# Altium PCB Pedal_SW.PcbDoc
Units mil, origin at the board's own origin, x right, y up, seen from the top; angles counter-clockwise.
Board outline 5452.6 x 517.36 mil, 2 copper layers (Top Layer, Bottom Layer), stack 42.17 mil thick; 21 components, 33 nets, 106 pads, 8 vias.
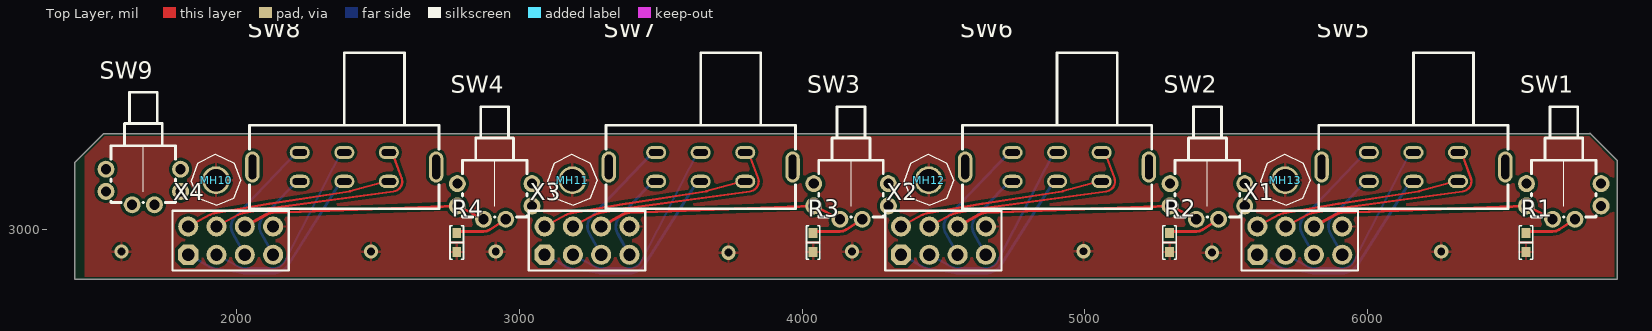
[diagram p0: Top Layer view]
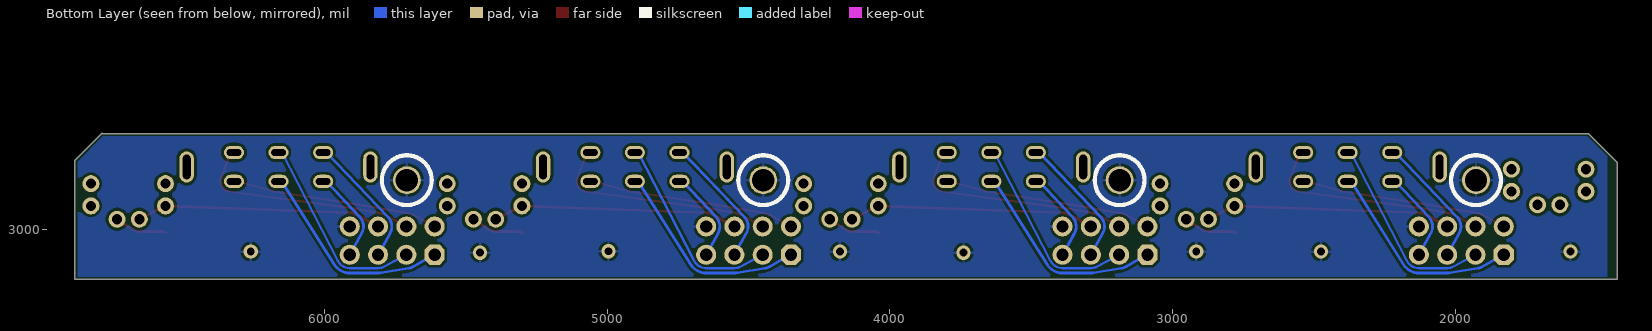
[diagram p1: Bottom Layer view, seen from below]
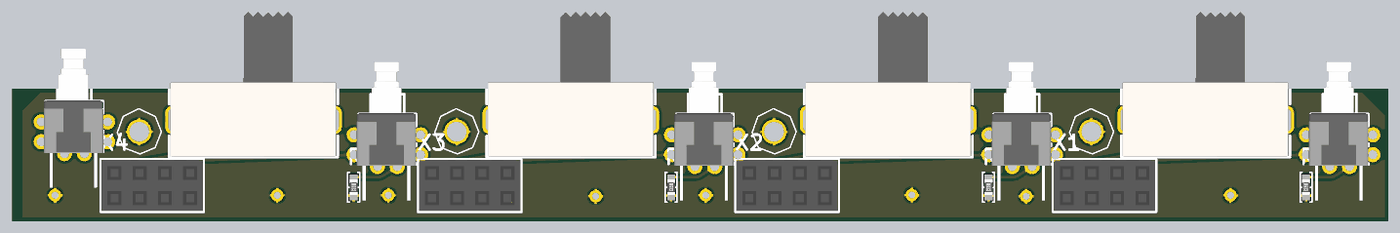
[diagram p2: 3D render of the assembled board from above, using the file's embedded part models]

## Layer stack, top to bottom
Top Solder: solder mask 0.4, Solder Resist, Dk 3.5
Top Layer: signal copper 1.4
Dielectric 1: dielectric 39.3701, FR-4, Dk 4.8
Bottom Layer: signal copper 1.4
Bottom Solder: solder mask 0.4, Solder Resist, Dk 3.5

## Board outline
1429.13,2822.83 1429.13,3236.22 1531.5,3338.58 6786.42,3338.58 6784.96,3340.2 6880.28,3244.88 6881.73,3243.27 6881.73,2822.83

## Design rules (kind name [scope] priority, off if disabled: settings)
BoardOutlineClearance [All] p1: gap=10 ignorepadtopadclearanceinfootprint=FALSE except(0: Arc-SplitContinuation Track-SplitContinuation SMDPad-SplitContinuation THPad-SplitContinuation Via-SplitContinuation Fill-SplitContinuation Poly-SplitContinuation Region-SplitContinuation Text-SplitContinuation)
Clearance [All] p1: gap=10 ignorepadtopadclearanceinfootprint=FALSE except(8: Arc-Arc Arc-Track Arc-SMDPad Arc-THPad Arc-Via Track-Track Track-SMDPad Track-THPad Track-Via)
PolygonConnect [All] p1: connectstyle=Relief reliefconductorwidth=10 reliefentries=4 polygonreliefangle="90 Angle" airgapwidth=10
RoutingVias [All] p1: holewidth=28 width=50 viastyle="Through Hole" minholewidth=28 minwidth=50 maxholewidth=28 maxwidth=50
SolderMaskExpansion [All] p1: expansion=4 istentingtop=FALSE
Width [All] p1: maxlimit=10 minlimit=8 preferedwidth=10
30 further rules are at their usual default settings.

## Classes and differential pairs
component class Pedal_SW: R1 R2 R3 R4 SW1 SW2 SW3 SW4 SW5 SW6 SW7 SW8 SW9 X1 X2 X3 X4

## Components (designator, comment, footprint, x,y, rotation, side; value= is the part's Value field where it differs from the comment)
MH10 "MountingHole" Hole_2.5mm 1928.32,3173.63 r0 top
MH11 "MountingHole" Hole_2.5mm 3188.16,3173.63 r0 top
MH12 "MountingHole" Hole_2.5mm 4448.01,3173.63 r0 top
MH13 "MountingHole" Hole_2.5mm 5707.85,3173.63 r0 top
R1 "510 Ohms" "YAGEO RES 0603_1608" 6559.37,2953.15 r270 top
R2 "510 Ohms" "YAGEO RES 0603_1608" 5299.37,2953.15 r270 top
R3 "510 Ohms" "YAGEO RES 0603_1608" 4039.37,2953.15 r270 top
R4 "510 Ohms" "YAGEO RES 0603_1608" 2779.37,2953.15 r270 top
SW1 "PushSwitch_DPDT" TK-6580A-1 6824.8,3161.42 r180 top
SW2 "PushSwitch_DPDT" TK-6580A-1 5564.96,3161.42 r180 top
SW3 "PushSwitch_DPDT" TK-6580A-1 4305.12,3161.42 r180 top
SW4 "PushSwitch_DPDT" TK-6580A-1 3045.28,3161.42 r180 top
SW5 "SlideSwitch_DPDT" SK-22F03-G060 6161.42,3271.65 r180 top
SW6 "SlideSwitch_DPDT" SK-22F03-G060 4901.57,3271.65 r180 top
SW7 "SlideSwitch_DPDT" SK-22F03-G060 3641.73,3271.65 r180 top
SW8 "SlideSwitch_DPDT" SK-22F03-G060 2381.89,3271.65 r180 top
SW9 "PushSwitch_DPDT" TK-6580A-1 1803.15,3212.6 r180 top
X1 "Connector, 8pin, 2.54mm, 500VAC, 3A" "CON: PBD-8" 5759.69,2960 r0 top
X2 "Connector, 8pin, 2.54mm, 500VAC, 3A" "CON: PBD-8" 4499.84,2960 r0 top
X3 "Connector, 8pin, 2.54mm, 500VAC, 3A" "CON: PBD-8" 3240,2960 r0 top
X4 "Connector, 8pin, 2.54mm, 500VAC, 3A" "CON: PBD-8" 1980.16,2960 r0 top

## Footprints (in the part's own frame and the unit in brackets; to place one, negate y for a bottom-side part, rotate by r counter-clockwise, add the part's x,y. Pads: shape width x height; smd on the part's side, far side on the other; paste and mask are expansions set on the pad)
"CON: PBD-8" [mm] "PBD-8"
  oct 1.8x1.8 hole 1.1: 1(-3.81,-1.27)
  round 1.8 hole 1.1: 2(-3.81,1.27) 3(-1.27,-1.27) 4(-1.27,1.27) 5(1.27,-1.27) 6(1.27,1.27) 7(3.81,-1.27) 8(3.81,1.27)
  silkscreen extent -5.23,-2.68 5.23,2.68, body extent -5.08,-2.54 5.08,2.54, height 8.5
Hole_2.5mm [mm]
  round 2.5 hole 2: 0(0,0)
  body extent -0.5,-0.5 0.5,0.5, height 0.5
SK-22F03-G060 [mm] "G-Switch SK-22F03-G060"
  oval 1.8x1.2 hole 0.6 slot 1.3 at 0 deg paste-2539.97 mask+0.05: 1(-4,0) 2(0,0) 3(4,0) 4(4,2.6) 5(0,2.6) 6(-4,2.6)
  oval 1.3x2.8 hole 0.7 slot 2.2 at 90 deg paste-2539.97 mask+0.05: 7(-8.25,1.3) 8(8.25,1.3)
  silkscreen extent -8.5,-8.95 8.5,5.05, body extent -8.32,-9.59 8.38,5.01, height 9
TK-6580A-1 [mil] "Pushbutton switch"
  round 60 hole 36 paste-99999 mask+2: 1(263.78,0) 2(263.78,78.74) 3(0,0) 4(0,78.74) 5(171.26,125.98) 6(92.52,125.98)
  silkscreen extent 18,-272 246,118, body extent 18,-291 254,261, height 317
"YAGEO RES 0603_1608" [mm] "Chip Resistor, 2-Leads, Body 1.60x0.80mm"
  rect 0.9x0.8 smd: 1(-0.85,0) 2(0.85,0)
  silkscreen extent -1.5,-0.6 1.5,0.6, body extent -0.8,-0.4 0.8,0.4, height 0.45

## Part data
R1 R2 R3 R4: library part AC0603FR-07510RL, "RES SMD 510 OHM 1% 1/10W 0603", Device Package="0603 (1608 Metric)", Manufacturer=Yageo, Operating Temperature="-55°C ~ 155°C", Power (Watts)="0.1W, 1/10W", Ratings=AEC-Q200, Supplier Device Package=0603, Supplier Part Number 1=YAG3615CT-ND, Temperature Coefficient=±100ppm/°C, Tolerance=±1%, ComponentLink1Description=Datasheet, ComponentLink1URL=https://www.yageo.com/upload/media/product/productsearch/datasheet/rchip/PYu-AC_51_RoHS_L_7.pdf, ComponentLink2Description="DigiKey Link", ComponentLink2URL=https://www.digikey.com/en/products/detail/yageo/AC0603FR-07510RL/5896175, Composition="Thick Film", Features="Automotive AEC-Q200, Moisture Resistant", Height - Seated (Max)="0.022\" (0.55mm)", LastUpdated="7/25/2024 9:19:25 AM", Lifecycle Status=Active, Minimum Order=1, Number of Terminations=2, Package / Case="0603 (1608 Metric)", Packaging=CutTape, Part Number=AC0603FR-07510RL, Part Status=Active, PartId=15979, Price=0.01, Resistance="510 Ohms", Series=AC, Size / Dimension="0.063\" L x 0.031\" W (1.60mm x 0.80mm)", Supplier 1=DigiKey
X1 X2 X3 X4: library part PBD-8, CurrentMax=3A, Manufacturer=Connfly, VoltageMax=500VAC, CommentText="\"Разъем\"", HelpURL=https://www.chipdip.ru/product/pbd-8, Multichannel=8pin, PartNumber=PBD-8, Pitch=2.54mm, TypeConnector=Connector, ValueManufacturerPartNumber="Connector, 8pin, 2.54mm, 500VAC, 3A"

## Via types
v1: diameter 50, hole 28, Top Layer to Bottom Layer, 8 vias

## Nets (pads, with @x,y where several pads share a name; then routed paths per layer and width w, separated by ;. In a path a pad name is that pad's centre, name@x,y a point inside that pad or via, vN(x,y) a via of type N, cw(c..) or ccw(c..) an arc to the next point about the centre after c; other vN are vias at no path point)
GND_A: MH10.0 MH11.0 MH12.0 MH13.0 R1.2 R2.2 R3.2 R4.2 X1.8 X2.8 X3.8 X4.8
  other v1: 3740.16,2917.32 5448.82,2917.32 1594.49,2921.26 2476.38,2921.26 2917.32,2921.26 4177.17,2921.26 6259.84,2921.26 4995,2922.32
NetR1_1: R1.1 SW1.6 | length 186.9
  Top Layer w10: R1.1@6558.9,2986.61 6569.65,2992.43 6653.54,2992.43 ccw(c6653.54,3035.43) 6677.03,2999.41 SW1.6
NetR2_1: R2.1 SW2.6 | length 186.9
  Top Layer w10: R2.1@5299.05,2986.61 5309.8,2992.43 5393.7,2992.43 ccw(c5393.7,3035.43) 5417.18,2999.41 SW2.6
NetR3_1: R3.1 SW3.6 | length 186.9
  Top Layer w10: R3.1@4039.21,2986.61 4049.96,2992.43 4133.86,2992.43 ccw(c4133.86,3035.43) 4157.34,2999.41 SW3.6
NetR4_1: R4.1 SW4.6 | length 186.9
  Top Layer w10: R4.1 2790.12,2992.43 2874.02,2992.43 ccw(c2874.02,3035.43) 2897.5,2999.41 SW4.6
NetSW1_2: SW1.2 SW1.5 X1.6 | length 867.9
  Top Layer w10: X1.6 5886.23,3052.37 cw(c5909.69,3010) 5907.89,3058.4 SW1.2 6561.47,3082.67 cw(c6561.32,3072.67) 6565.98,3081.52 SW1.5
NetSW2_2: SW2.2 SW2.5 X2.6 | length 867.9
  Top Layer w10: X2.6 4626.38,3052.37 cw(c4649.84,3010) 4648.04,3058.4 SW2.2 5301.62,3082.67 cw(c5301.47,3072.67) 5306.13,3081.52 SW2.5
NetSW3_2: SW3.2 SW3.5 X3.6 | length 867.9
  Top Layer w10: X3.6 3366.54,3052.37 cw(c3390,3010) 3388.2,3058.4 SW3.2 4041.78,3082.67 cw(c4041.63,3072.67) 4046.29,3081.52 SW3.5
NetSW4_2: SW4.2 SW4.5 X4.6 | length 867.9
  Top Layer w10: X4.6 2106.7,3052.37 cw(c2130.16,3010) 2128.36,3058.4 SW4.2 2781.94,3082.67 cw(c2781.79,3072.67) 2786.45,3081.52 SW4.5
SW1_1: SW5.1 X1.4 | length 814.5
  Top Layer w8: X1.4 5787.19,3051.76 cw(c5809.69,3010) 5801.17,3056.66 5897.91,3074.36 cw(c5909.69,3010) 5900.86,3074.84 6335.51,3133.99 ccw(c6330.71,3169.29) 6364.1,3181.69 6330.71,3271.65 SW5.1
SW1_2: SW6.1 X2.4 | length 814.5
  Top Layer w8: X2.4 4527.34,3051.76 cw(c4549.84,3010) 4541.32,3056.66 4638.06,3074.36 cw(c4649.84,3010) 4641.02,3074.84 5075.67,3133.99 ccw(c5070.86,3169.29) 5104.26,3181.69 5070.86,3271.65 SW6.1
SW1_3: SW7.1 X3.4 | length 814.5
  Top Layer w8: X3.4 3267.5,3051.76 cw(c3290,3010) 3281.48,3056.66 3378.22,3074.36 cw(c3390,3010) 3381.18,3074.84 3815.83,3133.99 ccw(c3811.02,3169.29) 3844.42,3181.69 3811.02,3271.65 SW7.1
SW1_4: SW8.1 X4.4 | length 814.5
  Top Layer w8: X4.4 2007.66,3051.76 cw(c2030.16,3010) 2021.64,3056.66 2118.38,3074.36 cw(c2130.16,3010) 2121.33,3074.84 2555.98,3133.99 ccw(c2551.18,3169.29) 2584.58,3181.69 2551.18,3271.65 SW8.1
SW2_1: SW5.2 X1.3 | length 706.6
  Bottom Layer w8: X1.3 5787.19,2868.24 ccw(c5809.69,2910) 5809.69,2862.57 5909.69,2862.57 ccw(c5909.69,2910) 5951.84,2888.26 6149.61,3271.65 SW5.2
SW2_2: SW6.2 X2.3 | length 706.6
  Bottom Layer w8: X2.3 4527.34,2868.24 ccw(c4549.84,2910) 4549.84,2862.57 4649.84,2862.57 ccw(c4649.84,2910) 4692,2888.26 4889.76,3271.65 SW6.2
SW2_3: SW7.2 X3.3 | length 706.6
  Bottom Layer w8: X3.3 3267.5,2868.24 ccw(c3290,2910) 3290,2862.57 3390,2862.57 ccw(c3390,2910) 3432.16,2888.26 3629.92,3271.65 SW7.2
SW2_4: SW8.2 X4.3 | length 706.6
  Bottom Layer w8: X4.3 2007.66,2868.24 ccw(c2030.16,2910) 2030.16,2862.57 2130.16,2862.57 ccw(c2130.16,2910) 2172.31,2888.26 2370.08,3271.65 SW8.2
SW3_1: SW5.3 X1.5 | length 475.9
  Bottom Layer w10: X1.5 5767.31,2986.54 cw(c5809.69,3010) 5774.62,3043.41 5992.13,3271.65 SW5.3
SW3_2: SW6.3 X2.5 | length 475.9
  Bottom Layer w10: X2.5 4507.47,2986.54 cw(c4549.84,3010) 4514.78,3043.41 4732.28,3271.65 SW6.3
SW3_3: SW7.3 X3.5 | length 475.9
  Bottom Layer w10: X3.5 3247.63,2986.54 cw(c3290,3010) 3254.94,3043.41 3472.44,3271.65 SW7.3
SW3_4: SW8.3 X4.5 | length 475.9
  Bottom Layer w10: X4.5 1987.78,2986.54 cw(c2030.16,3010) 1995.1,3043.41 2212.6,3271.65 SW8.3
SW4_1: SW5.4 X1.7 | length 332.9
  Bottom Layer w10: X1.7 5867.31,2986.54 cw(c5909.69,3010) 5874.28,3043.05 5992.13,3169.29 SW5.4
SW4_2: SW6.4 X2.7 | length 332.9
  Bottom Layer w10: X2.7 4607.47,2986.54 cw(c4649.84,3010) 4614.44,3043.05 4732.28,3169.29 SW6.4
SW4_3: SW7.4 X3.7 | length 332.9
  Bottom Layer w10: X3.7 3347.63,2986.54 cw(c3390,3010) 3354.6,3043.05 3472.44,3169.29 SW7.4
SW4_4: SW8.4 X4.7 | length 332.9
  Bottom Layer w10: X4.7 2087.78,2986.54 cw(c2130.16,3010) 2094.75,3043.05 2212.6,3169.29 SW8.4
SW5_1: SW5.5 X1.1 | length 737.4
  Bottom Layer w10: X1.1 5640.12,2894.35 5685.39,2868.1 ccw(c5709.69,2910) 5701.94,2862.19 5799.38,2846.4 ccw(c5809.69,2910) 5809.69,2845.57 5909.69,2845.57 ccw(c5909.69,2910) 5964.17,2875.6 6149.61,3169.29 SW5.5
SW5_2: SW6.5 X2.1 | length 737.4
  Bottom Layer w10: X2.1 4380.28,2894.35 4425.55,2868.1 ccw(c4449.84,2910) 4442.09,2862.19 4539.53,2846.4 ccw(c4549.84,2910) 4549.84,2845.57 4649.84,2845.57 ccw(c4649.84,2910) 4704.32,2875.6 4889.76,3169.29 SW6.5
SW5_3: SW7.5 X3.1 | length 737.4
  Bottom Layer w10: X3.1 3120.43,2894.35 3165.7,2868.1 ccw(c3190,2910) 3182.25,2862.19 3279.69,2846.4 ccw(c3290,2910) 3290,2845.57 3390,2845.57 ccw(c3390,2910) 3444.48,2875.6 3629.92,3169.29 SW7.5
SW5_4: SW8.5 X4.1 | length 737.4
  Bottom Layer w10: X4.1 1860.59,2894.35 1905.86,2868.1 ccw(c1930.16,2910) 1922.41,2862.19 2019.85,2846.4 ccw(c2030.16,2910) 2030.16,2845.57 2130.16,2845.57 ccw(c2130.16,2910) 2184.64,2875.6 2370.08,3169.29 SW8.5
SW6_1: SW5.6 X1.2 | length 731.6
  Top Layer w8: X1.2 5687.19,3051.76 cw(c5709.69,3010) 5701.62,3056.74 5895.84,3090.25 cw(c5909.69,3010) 5897.22,3090.47 6178.68,3134.09 ccw(c6173.23,3169.29) 6182.71,3134.95 6307.09,3169.29 SW5.6
SW6_2: SW6.6 X2.2 | length 731.6
  Top Layer w8: X2.2 4427.34,3051.76 cw(c4449.84,3010) 4441.78,3056.74 4636,3090.25 cw(c4649.84,3010) 4637.37,3090.47 4918.84,3134.09 ccw(c4913.38,3169.29) 4922.86,3134.95 5047.24,3169.29 SW6.6
SW6_3: SW7.6 X3.2 | length 731.6
  Top Layer w8: X3.2 3167.5,3051.76 cw(c3190,3010) 3181.94,3056.74 3376.16,3090.25 cw(c3390,3010) 3377.53,3090.47 3659,3134.09 ccw(c3653.54,3169.29) 3663.02,3134.95 3787.4,3169.29 SW7.6
SW6_4: SW8.6 X4.2 | length 731.6
  Top Layer w8: X4.2 1907.66,3051.76 cw(c1930.16,3010) 1922.09,3056.74 2116.31,3090.25 cw(c2130.16,3010) 2117.69,3090.47 2399.16,3134.09 ccw(c2393.7,3169.29) 2403.18,3134.95 2527.56,3169.29 SW8.6
pads on no net: SW1.1 SW1.3 SW1.4 SW2.1 SW2.3 SW2.4 SW3.1 SW3.3 SW3.4 SW4.1 SW4.3 SW4.4 SW5.7 SW5.8 SW6.7 SW6.8 SW7.7 SW7.8 SW8.7 SW8.8 SW9.1 SW9.2 SW9.3 SW9.4 SW9.5 SW9.6

## Polygon pours and split planes (outlines as drawn)
GND_A on Bottom Layer "NONET_L02_P-001" (solid, remove dead copper, pour order 2): 1465,3370 6880,3370 6880,2645 1465,2645
GND_A on Top Layer "NONET_L02_P-001" (solid, remove dead copper, pour order 3): 1465,3370 6880,3370 6880,2645 1465,2645

## Silkscreen, mask and mechanical layers (free items; w line width, h text height)
Top Overlay:
  lines w5: 1841.38,3170.46 1866.38,3110.46 1931.59,3085.68 1991.38,3110.46 2016.34,3173.65 1992.12,3234.3 1926.38,3265.46 1864.5,3234.3 1841.38,3170.46 ; 3101.22,3170.46 3124.34,3234.3 3186.22,3265.46 3251.96,3234.3 3276.18,3173.65 3251.22,3110.46 3191.43,3085.68 3126.22,3110.46 3101.22,3170.46 ; 4361.06,3170.46 4384.18,3234.3 4446.06,3265.46 4511.8,3234.3 4536.03,3173.65 4511.06,3110.46 4451.27,3085.68 4386.06,3110.46 4361.06,3170.46 ; 5620.91,3170.46 5644.02,3234.3 5705.91,3265.46 5771.65,3234.3 5795.87,3173.65 5770.91,3110.46 5711.11,3085.68 5645.91,3110.46 5620.91,3170.46
Bottom Overlay:
  circle w15: c5707.85,3173.63 r88.03
  circle w15: c4448.01,3173.63 r88.03
  circle w15: c3188.16,3173.63 r88.03
  circle w15: c1928.32,3173.63 r88.03
Board:
  lines w10: 6784.96,3340.2 6880.28,3244.88 ; 6786.42,3338.58 1531.5,3338.58 1429.13,3236.22 1429.13,2822.83 6881.73,2822.83 6881.73,3243.27